# EAGLE board V1d (EAGLE 6.5.0)
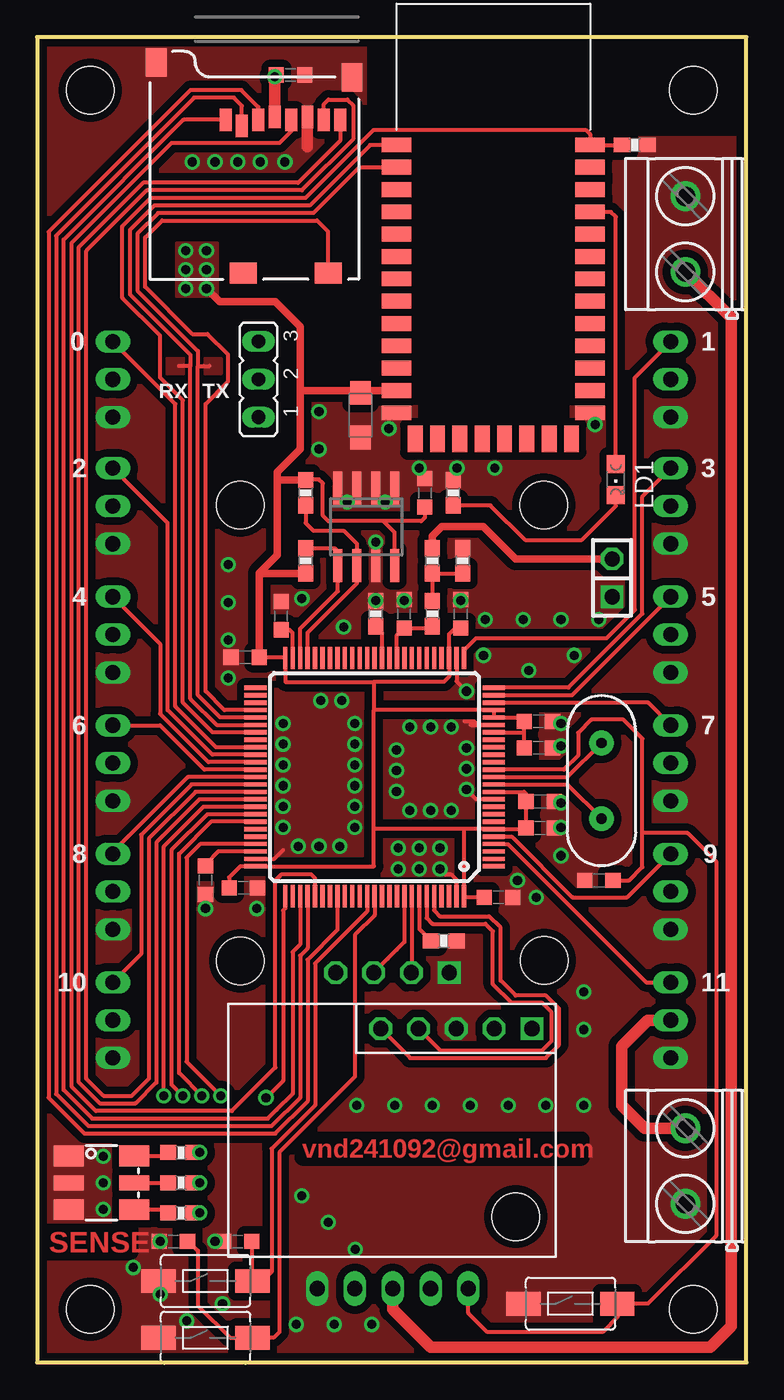
[diagram p0: board, top side]
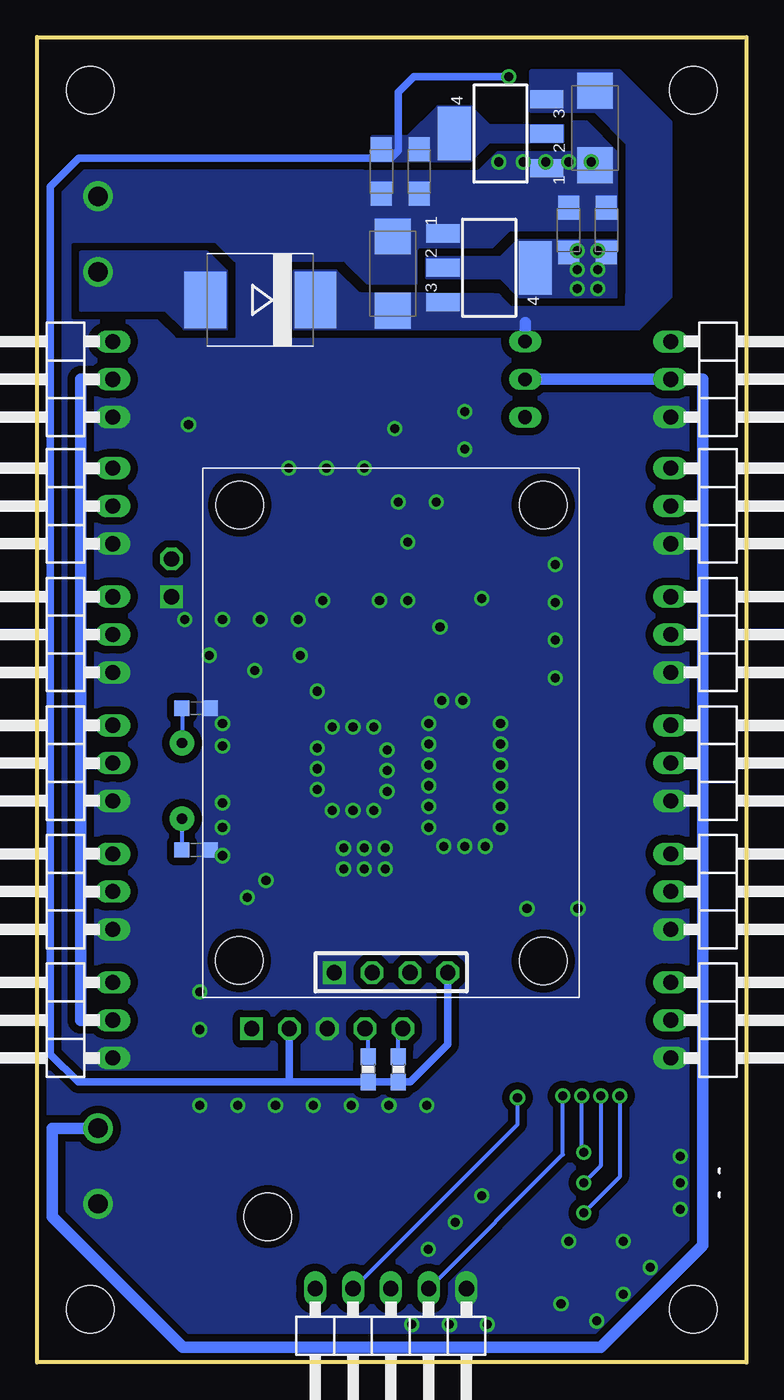
[diagram p1: board, bottom side, seen from below]

Size 47.62 x 89.03 mm. Coordinates in mm from the lower left corner, seen from the top.
Outline: 47.62,89.03 0,89.03 0,0 47.62,0 47.62,89.03
Copper layers (1*16): Top 0.035mm / dielectric 1.5mm / Bottom 0.035mm
Design rules "default *": minimum track width 10mil, minimum drill 24mil, track to track 8mil, track to pad 8mil, pad to pad 8mil, via to via 10mil, smd to smd 8mil, copper to edge 20mil, drill to drill 10mil, minimum pad ring 10mil, minimum via ring 8mil, stop-mask expansion 0mil, vias tented up to drill 100mil, thermal gap 10mil
Net classes: 0 Default: width 0.203 mm; 1 power: width 0.15 mm, drill 0.2 mm, clearance 0.152 mm
Holes 3.2 mm at 44.07,85.47 3.56,85.47 44.07,3.56 3.56,3.56

## Footprints (pad centres in the part's own frame; a part is rotated, then mirrored left to right if it is on the bottom)
C-0603 = smd 1.016 x 1.016: 1 -0.953,0; 2 0.953,0
SMC_A = smd 1.6 x 1.4: + -1.5,0; - 1.5,0
SMC_C = smd 2.4 x 2.4: + -2.5,0; - 2.5,0
SMC = smd 2.8 x 3.8: A 3.7,0; C -3.7,0
LINEAR_SOT223 = smd 1.219 x 2.235: 1 -2.311,-3.099; 2 0,-3.099; 3 2.311,-3.099 | smd 3.6 x 2.2: 4 0,3.099
SO-08 = smd 0.6 x 2.2: 1 -1.905,-2.6; 2 -0.635,-2.6; 3 0.635,-2.6; 4 1.905,-2.6; 5 1.905,2.6; 6 0.635,2.6; 7 -0.635,2.6; 8 -1.905,2.6
1X03/90 = drill 1.016 long: 1 -2.54,-3.81; 2 0,-3.81; 3 2.54,-3.81
1X02 = drill 1.016 square: 1 -1.27,0 | drill 1.016 octagon: 2 1.27,0
1X05/90 = drill 1.016 long: 1 -5.08,-3.81; 2 -2.54,-3.81; 3 0,-3.81; 4 2.54,-3.81; 5 5.08,-3.81
JP2 = drill 0.914 long: 1 -2.54,0; 2 0,0; 3 2.54,0
CHIPLED_0805 = smd 1.2 x 1.2: A 0,-1.05; C 0,1.05
SPARKFUN_0603-RES = smd 1.1 x 1: 1 -0.85,0; 2 0.85,0
TACTILE-SWITCH-1101NE = smd 2.3 x 1.6: P$1 -3.15,0; P$2 3.15,0
MICRO-SD-SOCKET-PP = smd 0.8 x 1.5: 1 -8.94,10.7; 2 -7.84,10.3; 3 -6.74,10.7; 4 -5.64,10.9; 5 -4.54,10.7; 6 -3.44,10.9; 7 -2.34,10.7; 8 -1.24,10.7 | smd 1.8 x 1.4: CD1 -2.05,0.4; CD2 -7.75,0.4 | smd 1.4 x 1.9: GND1 -13.6,14.55; GND3 -0.45,13.55
TQFP100 = smd 1.5 x 0.29: 1 -8,6; 2 -8,5.5; 3 -8,5; 4 -8,4.5; 5 -8,4; 6 -8,3.5; 7 -8,3; 8 -8,2.5; 9 -8,2; 10 -8,1.5; 11 -8,1; 12 -8,0.5; 13 -8,0; 14 -8,-0.5; 15 -8,-1; 16 -8,-1.5; 17 -8,-2; 18 -8,-2.5; 19 -8,-3; 20 -8,-3.5; 21 -8,-4; 22 -8,-4.5; 23 -8,-5; 24 -8,-5.5; 25 -8,-6; 51 8,-6; 52 8,-5.5; 53 8,-5; 54 8,-4.5; 55 8,-4; 56 8,-3.5; 57 8,-3; 58 8,-2.5; 59 8,-2; 60 8,-1.5; 61 8,-1; 62 8,-0.5; 63 8,0; 64 8,0.5; 65 8,1; 66 8,1.5; 67 8,2; 68 8,2.5; 69 8,3; 70 8,3.5; 71 8,4; 72 8,4.5; 73 8,5; 74 8,5.5; 75 8,6 | smd 0.29 x 1.5: 26 -6,-8; 27 -5.5,-8; 28 -5,-8; 29 -4.5,-8; 30 -4,-8; 31 -3.5,-8; 32 -3,-8; 33 -2.5,-8; 34 -2,-8; 35 -1.5,-8; 36 -1,-8; 37 -0.5,-8; 38 0,-8; 39 0.5,-8; 40 1,-8; 41 1.5,-8; 42 2,-8; 43 2.5,-8; 44 3,-8; 45 3.5,-8; 46 4,-8; 47 4.5,-8; 48 5,-8; 49 5.5,-8; 50 6,-8; 76 6,8; 77 5.5,8; 78 5,8; 79 4.5,8; 80 4,8; 81 3.5,8; 82 3,8; 83 2.5,8; 84 2,8; 85 1.5,8; 86 1,8; 87 0.5,8; 88 0,8; 89 -0.5,8; 90 -1,8; 91 -1.5,8; 92 -2,8; 93 -2.5,8; 94 -3,8; 95 -3.5,8; 96 -4,8; 97 -4.5,8; 98 -5,8; 99 -5.5,8; 100 -6,8
BLUETOOTH_SMD = smd 2 x 1: 1 0,0; 2 0,-1.5; 3 0,-3; 4 0,-4.5; 5 0,-6; 6 0,-7.5; 7 0,-9; 8 0,-10.5; 9 0,-12; 10 0,-13.5; 11 0,-15; 12 0,-16.5; 13 0,-18; 22 13,-18; 23 13,-16.5; 24 13,-15; 25 13,-13.5; 26 13,-12; 27 13,-10.5; 28 13,-9; 29 13,-7.5; 30 13,-6; 31 13,-4.5; 32 13,-3; 33 13,-1.5; 34 13,0 | smd 1 x 1.8: 14 1.25,-19.75; 15 2.75,-19.75; 16 4.25,-19.75; 17 5.75,-19.75; 18 7.25,-19.75; 19 8.75,-19.75; 20 10.25,-19.75; 21 11.75,-19.75
BREAKOUT = drill 1.016 square: 1 12.64,-1.096 | drill 1.016 octagon: 2 12.64,1.444; 3 12.64,3.984; 4 12.64,6.524; 5 12.64,9.064 | hole 3.2: 0.006,0
23X30 = drill 1.016 square: 1 0.013,-6.237 | drill 1.016 octagon: 2 0.013,-8.777; 3 0.013,-11.317; 4 0.013,-13.857 | hole 3.2: 31.429,-20.267; 31.429,0.113; 0.811,-20.263; 0.837,0.139
SMD = smd 1.99 x 1.4: B+ -2.2,-1.8; B- 2.2,-1.8; R+ -2.2,1.8; R- 2.2,1.8 | smd 1.99 x 1: G+ -2.2,0; G- 2.2,0
MKDSN1,5/2-5,08 = drill 1.3 pad 2: 1 -2.561,0.025; 2 2.519,0.025
HC49US = drill 0.7 pad 1.651: 1 -2.54,0; 2 2.54,0

## Placement (x,y rotation side)
C1  [C-0603]  36.96,34.42 0 bottom
C2  [C-0603]  17.02,86.49 180 top
C3  6v 10u  [SMC_A]  11.94,76.07 90 bottom
C4  6v 10u  [SMC_A]  21.72,63.63 270 top
C5  16v47u  [SMC_C]  23.75,73.15 90 bottom
C6  [C-0603]  33.66,43.05 0 top
C7  [C-0603]  24.64,50.29 270 top
C8  [C-0603]  33.66,41.28 0 top
C9  [C-0603]  33.78,37.67 0 top
C10  [C-0603]  33.78,35.89 0 top
C11  [C-0603]  26.04,58.42 270 top
C12  [C-0603]  30.99,31.24 0 top
C13  [C-0603]  37.72,32.39 180 top
C14  [C-0603]  28.45,50.29 90 top
C15  [C-0603]  16.38,50.17 90 top
C16  6v 10u  [SMC_A]  21.97,80.01 270 bottom
C17  [C-0603]  11.3,32.39 270 top
C18  [C-0603]  13.97,47.37 180 top
C19  [C-0603]  13.84,31.88 0 top
C20  [C-0603]  36.96,43.94 0 bottom
C21  6v 10u  [SMC_A]  24.51,80.01 270 bottom
C22  16v47u  [SMC_C]  10.16,82.93 270 bottom
C23  6v 10u  [SMC_A]  9.4,76.07 90 bottom
C24  [C-0603]  13.46,8.13 180 top
C25  [C-0603]  9.14,8.13 180 top
D5  MBRS330T3  [SMC]  32.64,71.37 180 bottom
IC1  LINEAR_MC33269ST-3.3T3  [LINEAR_SOT223]  16.51,82.55 90 bottom
IC2  24LC256SN  [SO-08]  22.1,56.13 180 top
IC3  LINEAR_MC33269ST-3.3T3  [LINEAR_SOT223]  17.27,73.53 270 bottom
JP1  [1X03/90]  46.36,40.26 90 bottom
JP2  [1X03/90]  46.36,22.99 90 bottom
JP3  [1X02]  38.61,52.7 90 top
JP4  [1X05/90]  23.88,1.14 180 bottom
JP5  [1X03/90]  46.36,48.89 90 bottom
JP6  [1X03/90]  46.36,66.04 90 bottom
JP7  [1X03/90]  1.27,66.04 270 bottom
JP8  [1X03/90]  46.36,31.62 90 bottom
JP9  [1X03/90]  1.27,57.53 270 bottom
JP10  [1X03/90]  1.27,48.89 270 bottom
JP11  [1X03/90]  46.36,57.53 90 bottom
JP12  [1X03/90]  1.27,40.26 270 bottom
JP13  [1X03/90]  1.27,31.62 270 bottom
JP14  [1X03/90]  1.27,22.99 270 bottom
JP15  [JP2]  14.86,66.04 90 top
LD1  [CHIPLED_0805]  38.86,59.31 180 top
R1  4K7  [SPARKFUN_0603-RES]  25.4,19.68 270 bottom
R2  10K  [SPARKFUN_0603-RES]  9.65,10.03 180 top
R3  10K  [SPARKFUN_0603-RES]  9.65,12.06 180 top
R4  4K7  [SPARKFUN_0603-RES]  23.37,19.68 270 bottom
R5  10K  [SPARKFUN_0603-RES]  40.13,81.79 0 top
R6  10K  [SPARKFUN_0603-RES]  9.65,14.1 180 top
R7  10k  [SPARKFUN_0603-RES]  27.3,28.32 180 top
R8  0.5k  [SPARKFUN_0603-RES]  22.73,50.29 270 top
R9  10K  [SPARKFUN_0603-RES]  27.94,58.42 90 top
R15  4K7  [SPARKFUN_0603-RES]  18.03,58.42 270 top
R16  4K7  [SPARKFUN_0603-RES]  18.03,53.85 270 top
R23  10K  [SPARKFUN_0603-RES]  26.54,50.29 270 top
R24  10K  [SPARKFUN_0603-RES]  26.54,53.85 90 top
R25  10K  [SPARKFUN_0603-RES]  28.57,53.85 270 top
S1  RESET  [TACTILE-SWITCH-1101NE]  35.81,3.94 0 top
S2  RESET  [TACTILE-SWITCH-1101NE]  11.3,1.65 0 top
S3  RESET  [TACTILE-SWITCH-1101NE]  11.3,5.46 0 top
SDCARD2  microSD Socket  [MICRO-SD-SOCKET-PP]  21.59,72.77 0 top
STM  STM32F4X7VX  [TQFP100]  22.66,39.32 180 top
U1  HC_05  [BLUETOOTH_SMD]  24.13,81.79 0 top
U$1  GY-88  [BREAKOUT]  32.13,9.78 90 top
U$10  GPS_MODULE  [23X30]  33.91,26.16 90 bottom
U$12  RGB_LED  [SMD]  4.32,12.06 0 top
X1  MKDSN1,5/2-5,08  [MKDSN1,5/2-5,08]  43.56,75.82 90 top
X2  MKDSN1,5/2-5,08  [MKDSN1,5/2-5,08]  43.56,13.21 90 top
Y1  [HC49US]  37.9,39.07 270 top

## Library data of the parts
C1 C2 C6-C15 C17-C20 C24 C25 = cap-pan40
C3-C5 C16 C21-C23 = rcl
D5 = Robotech Diode of Chung
IC1 IC3 = Robotech_Other
IC2 = microchip; DIGIKEY: 24LC256-E/SN-ND; MF: MICROCHIP; MPN: 24LC256-I/SN; OC_FARNELL: 9757996; OC_NEWARK: 27C9144
JP1 JP2 JP4-JP14 = pinhead-1
JP3 = pinhead
JP15 = jumper
LD1 = led
R1-R9 R15 R16 R23-R25 = Robotech_RCL
S1-S3 = pixhawk2; PARTNO: EVQ-P7J01P
SDCARD2 = SparkFun
STM = pixhawk2; PARTNO: STM32F427VI
U1 = SerialPortBluetooth
U$1 = GY88
U$10 = GPS_module
U$12 = RGB_LED
X1 X2 = con-phoenix-508; MPN: MKDSN 1,5/2-5.08; OC_FARNELL: 1792903; OC_NEWARK: 30M2397
Y1 = SparkFun-FreqCtrl

## Nets
3V3_MCU: C3.+ C4.+ C6.1 C8.1 C9.1 C10.1 C11.2 C12.1 C14.1 C18.1 C19.1 C23.+ IC2.8 IC3.2 IC3.4 R15.1 R16.2 STM.6 STM.11 STM.19 STM.21 STM.22 STM.28 STM.50 STM.75 STM.100 U1.12
3V3_SENSOR: C2.2 C16.+ C21.+ IC1.2 IC1.4 R1.2 R4.2 SDCARD2.4 U$1.2 U$10.4
+5V: JP1.2 JP2.2 JP5.2 JP6.2 JP7.2 JP8.2 JP9.2 JP10.2 JP11.2 JP12.2 JP13.2 JP14.2 JP15.2 X2.2
ADC12_IN8: C7.2 R23.2 STM.35
BOOT0: R7.2 STM.94
BOOT1: R8.2 STM.37
BT_KEY: R5.1 STM.57 U1.34
BUTTONA: C24.1 S3.P$2 STM.87
BUTTONB: C25.1 S2.P$2 STM.88
GND: C1.2 C2.1 C3.- C4.- C5.- C6.2 C7.1 C8.2 C9.2 C10.2 C11.1 C12.2 C13.2 C14.2 C15.2 C16.- C17.2 C18.2 C19.2 C20.2 C21.- C22.- C23.- C24.2 C25.2 IC1.1 IC2.1 IC2.2 IC2.3 IC2.4 IC2.7 IC3.1 JP1.1 JP2.1 JP3.1 JP4.1 JP5.1 JP6.1 JP7.3 JP8.1 JP9.3 JP10.3 JP11.1 JP12.3 JP13.3 JP14.3 R5.2 R7.1 R8.1 R9.2 R25.1 S1.P$1 S2.P$1 S3.P$1 SDCARD2.6 SDCARD2.GND1 SDCARD2.GND3 STM.10 STM.20 STM.27 STM.74 STM.99 U1.13 U1.22 U$1.3 U$10.1 U$12.B+ U$12.G+ U$12.R+ X1.2 X2.1
I2C1_SCL: R1.1 STM.95 U$1.4
I2C1_SDA: R4.1 STM.96 U$1.5
I2C2_SCL: IC2.6 R15.2 STM.47
I2C2_SDA: IC2.5 R16.1 STM.48
JTDI: STM.77
N$1: C1.1 STM.12 Y1.2
N$2: R2.2 U$12.B-
N$3: JP3.2 R24.2
N$4: LD1.A U1.31
N$5: LD1.C R9.1
N$6: R3.2 U$12.G-
N$7: R6.2 U$12.R-
N$9: D5.A JP4.3 X1.1
N$27: R23.1 R24.1 R25.2
N$29: C20.1 STM.13 Y1.1
N$31: C17.1 STM.73
N$32: C15.1 STM.49
PWM_0: JP7.1 STM.59
PWM_1: JP6.3 STM.26
PWM_2: JP9.1 STM.60
PWM_3: JP11.3 STM.25
PWM_4: JP10.1 STM.61
PWM_5: JP5.3 STM.24
PWM_6: JP12.1 STM.62
PWM_7: JP1.3 STM.23
PWM_8: JP13.1 STM.63
PWM_9: JP8.3 STM.5
PWM_10: JP14.1 STM.64
PWM_11: JP2.3 STM.4
RGB_CH1: R2.1 STM.67
RGB_CH2: R3.1 STM.68
RGB_CH3: R6.1 STM.69
SDIO_CLK: SDCARD2.5 STM.80
SDIO_CMD: SDCARD2.3 STM.83
SDIO_D0: SDCARD2.7 STM.65
SDIO_D1: SDCARD2.8 STM.66
SDIO_D2: SDCARD2.1 STM.78
SDIO_D3: SDCARD2.2 STM.79
SDIO_DETECT: SDCARD2.CD1 STM.54
SW-!RESET: C13.1 JP4.5 S1.P$2 STM.14
SW_CLK: JP4.4 STM.76
SW_DIO: JP4.2 STM.72
USART1_RX: STM.93 U$10.2
USART1_TX: STM.92 U$10.3
USART3_RX: STM.56 U1.1
USART3_TX: STM.55 U1.2
VDD: C5.+ C22.+ D5.C IC1.3 IC3.3 JP15.3

## Tracks (layer width: path | path; a pad name or v marks a point on that pad's centre or on a via)
3V3_MCU  (via drill 0.61)
  Top 0.254: C8.1 32.7,42.32 | STM.19 32.7,42.32 | 32.7,42.32 C6.1 32.43,43.32 STM.21 STM.22 22.61,43.82 | C10.1 32.83,35.95 | 32.83,35.95 C9.1 32.83,38.19 32.7,38.32 STM.11 | STM.100 28.71,31.37 | 29.84,31.24 28.66,31.24 STM.100 | 29.97,31.18 C12.1 | 32.83,35.95 32.7,35.82 STM.6 28.66,35.82 | C14.1 28.07,49.34 27.66,48.93 STM.28 27.66,46.08 27.3,45.72 22.61,45.72 | 28.66,35.82 STM.100 | 22.61,35.82 22.61,33.32 STM.75 13.64,33.32 12.89,32.58 C19.1 | 22.61,35.82 22.61,43.82 | 28.66,35.82 22.61,35.82 | 22.61,45.72 16.66,45.72 STM.50 16.66,47.37 C18.1 | 22.61,45.72 22.61,43.82 | IC2.8 24,55.75 23.24,56.52 | 23.24,56.52 19.56,56.52 19.18,56.9 19.18,59.06 18.92,59.31 18.07,59.31 R15.1 | C11.2 26.04,56.77 25.78,56.52 23.24,56.52
  Top 0.508: 29.84,31.24 C12.1 | 21.72,65.29 U1.12 | C4.+ 21.72,65.29 | 21.72,65.29 17.65,65.29 | 17.65,65.29 17.65,61.34 16.13,59.82 16.13,59.27 | 16.13,59.27 16.13,54.23 14.92,53.02 14.92,53 | 14.92,53 C18.1 | R16.2 14.92,53 | 16.13,59.27 R15.1 | 17.65,65.29 17.65,69.6 16,71.25 12.26,71.25 v11.37,72.14
  other vias: 9.97,73.41 9.97,72.14 11.37,73.41 11.37,74.68 9.97,74.68
  pour Bottom (isolate 0.508, no thermals): 8.76,75.31 15.37,75.31 16.51,74.17 21.46,74.17 21.46,72.9 16.51,72.9 15.24,71.63 8.76,71.63
  pour Top (isolate 0.508, no thermals): 9.4,71.63 9.4,75.18 12.07,75.18 12.07,71.63
3V3_SENSOR  (via drill 0.61)
  Top 0.762: SDCARD2.4 v15.95,86.36 15.95,86.49 C2.2
  Bottom 0.508: v15.95,86.36 22.35,86.36 23.37,85.34 23.37,81.41 23.88,80.9 44.83,80.9 46.74,78.99 46.74,20.7 44.87,18.84 30.69,18.84 | 30.69,18.84 R1.2 R4.2 22.57,18.84 20.05,21.35 U$10.4 | U$1.2 30.69,18.84
  pour Bottom (isolate 0.508, no thermals): 12.32,82.04 12.32,83.06 17.27,83.06 18.54,84.33 20.7,84.33 22.73,82.3 25.15,82.3 25.15,80.77 18.54,80.77 17.27,82.04
+5V
  Top 0.762: JP2.2 41.02,22.99 39.24,21.21 39.24,17.27 40.79,15.73 X2.2
  Bottom 0.508: 44.7,22.99 44.7,22.86
  Bottom 0.762: JP10.2 2.92,48.89 | 2.92,57.53 JP9.2 | JP12.2 2.92,40.26 | JP8.2 44.7,31.62 | JP1.2 44.7,40.26 | JP5.2 44.7,48.89 | JP6.2 44.7,66.04 44.7,57.53 | JP13.2 2.92,31.62 | 2.92,57.53 2.92,66.04 JP7.2 JP15.2 | 2.92,48.89 2.92,40.26 | 2.92,40.26 2.92,31.62 | 44.7,31.62 44.7,40.26 | 44.7,40.26 44.7,48.89 | JP11.2 44.7,57.53 | 44.7,48.89 44.7,57.53 | 44.7,31.62 44.7,22.99 JP2.2 | 2.92,48.89 2.92,57.53 | 2.92,22.99 2.92,7.87 9.78,1.02 37.85,1.02 46.61,9.78 46.61,15.73 X2.2 | JP14.2 2.92,22.99 | 2.92,22.99 2.92,31.62
ADC12_IN8
  Top 0.254: 24.41,49.11 C7.2 | STM.35 24.16,48.86 C7.2 | C7.2 26.54,49.34 R23.2
BOOT0
  Top 0.254: STM.94 25.66,29.12 R7.2
BOOT1
  Top 0.254: STM.37 23.16,49.02 R8.2
BT_KEY
  Top 0.254: 37.21,81.92 37.34,81.79 R5.1 | STM.57 11.78,42.32 9.78,44.32 9.78,64.64 8.25,66.17 8.25,68.96 5.71,71.5 5.71,76.33 7.62,78.23 18.03,78.23 22.61,82.8 36.83,82.8 37.13,82.5 U1.34
  Top 0.508: U1.34 37.21,81.87 37.21,81.92
BUTTONA
  Top 0.254: C24.1 14.45,8.09 S3.P$2 15.11,5.46 15.75,6.1 15.75,14.35 18.67,17.27 18.67,26.8 22.16,30.29 STM.87
BUTTONB
  Top 0.254: C25.1 10.16,8.13 10.8,7.49 10.8,3.81 12.95,1.65 S2.P$2 15.88,1.65 16.26,2.03 16.26,14.1 21.34,19.18 21.34,28.7 22.66,30.03 STM.88
GND  (via drill 0.61)
  Top 0.254: 28.7,43.05 29.34,43.05 29.57,42.82 STM.20 29.11,42.82 | STM.27 28.16,45.75 v28.83,45.08 | STM.74 15.91,33.82 16.51,34.42 | STM.99 28.16,32.42 27.81,32.77 27.43,32.77 v27.05,33.15 | STM.10 29.49,37.82 v28.83,38.48
  Top 0.762: SDCARD2.6 18.15,81.66
  other vias: 17.78,51.31 29.97,47.5 22.73,51.18 24.13,41.15 24.13,39.75 24.13,38.35 25.02,37.08 26.42,37.08 27.81,37.08 28.83,41.28 28.83,39.88 25.02,42.67 26.42,42.67 27.81,42.67 11.3,30.48 21.34,37.34 21.34,38.73 21.34,40.13 21.34,35.94 20.45,44.45 19.05,44.45 17.53,34.67 20.32,34.67 18.92,34.67 21.34,41.53 21.34,42.93 16.51,42.93 16.51,41.53 16.51,37.34 16.51,38.73 16.51,40.13 16.51,35.94 24.26,34.54 27.05,34.54 25.65,34.54 24.26,33.15 25.65,33.15 24.64,51.18 23.37,57.78 20.83,57.78 33.53,31.24 32.26,32.39 35.18,42.93 35.18,41.4 35.18,37.59 35.18,35.94 35.18,34.04 22.73,55.12 33.02,46.48 10.41,80.65 11.94,80.65 13.46,80.65 14.99,80.65 16.64,80.65 14.73,30.48 11.94,8.13 8.25,8.13 4.45,13.84 4.45,12.06 4.45,10.29 18.92,63.88 18.92,61.34 36.07,47.5 32.64,49.91 30.1,49.91 35.18,49.91 37.72,49.91 28.45,51.18 28.19,60.07 25.65,60.07 30.73,60.07 37.47,62.99 8.25,4.57 10.05,2.78 6.46,6.37 19.94,2.54 17.4,2.54 22.48,2.54 19.56,9.4 21.35,7.6 17.76,11.19 31.62,17.27 29.08,17.27 34.16,17.27 36.7,17.27 24,17.27 21.46,17.27 26.54,17.27 36.7,22.35 36.7,24.89 12.45,3.94 23.62,62.74 12.83,48.51 12.83,45.97 12.83,51.05 12.83,53.59 20.57,49.4
  pour Top (isolate 0.508, rank 6, no thermals): 35.94,82.17 35.94,63.5 25.4,63.5 25.4,82.17 21.97,82.17 21.97,95.76 -7.75,95.76 -6.86,-6.73 50.67,-6.73 49.78,82.17
  pour Bottom (isolate 0.508, rank 6, no thermals): 21.21,80.01 53.59,80.01 69.6,-11.56 -9.14,-11.56 -9.14,89.79 21.21,89.79
I2C1_SCL
  Top 0.254: STM.95 26.16,29.85 26.54,29.46 30.1,29.46 30.61,28.96 30.61,25.4 31.88,24.13 33.91,24.13 34.54,23.5 34.54,21.59 33.91,20.95 27.07,20.95 U$1.4
  Bottom 0.254: R1.1 25.4,22.21 U$1.4
I2C1_SDA
  Top 0.254: STM.96 26.66,30.36 27.05,29.97 30.35,29.97 31.11,29.21 31.11,25.65 32.13,24.64 34.16,24.64 35.05,23.75 35.05,21.34 34.16,20.45 25.04,20.45 U$1.5
  Bottom 0.254: R4.1 23.37,22.12 U$1.5
I2C2_SCL
  Top 0.254: STM.47 18.16,49.02 21.46,52.32 IC2.6 21.46,54.99 20.57,55.88 18.54,55.88 18.03,56.39 R15.2
I2C2_SDA
  Top 0.254: 20.19,52.45 IC2.5 | 20.07,53.66 IC2.5 | STM.48 17.66,49.28 20.19,51.82 IC2.5 | R16.1 19.98,54.7 20.19,54.48 IC2.5
N$1
  Top 0.254: STM.12 35.61,38.82 Y1.2
  Bottom 0.254: C1.1 Y1.2
N$2
  Top 0.254: U$12.B- 8.8,10.27 R2.2
N$3
  Top 0.508: JP3.2 32.13,53.97 30.54,55.56 30.1,56.01 29.97,56.13 27.18,56.13 26.54,55.5 R24.2
N$4
  Top 0.254: LD1.A 38.86,76.96 38.54,77.29 U1.31
N$5
  Top 0.254: LD1.C 38.86,57.53 36.58,55.25 32.77,55.25 30.44,57.57 R9.1
N$6
  Top 0.254: U$12.G- R3.2
N$7
  Top 0.254: U$12.R- 8.8,13.87 R6.2
N$9
  Top 0.762: JP4.3 23.88,3.56 26.42,1.02 45.21,1.02 46.61,2.41 46.61,70.19 X1.1
  pour Bottom (isolate 0.762, no thermals): 44.7,70.74 38.99,70.74 37.72,69.47 34.93,69.47 34.93,73.28 36.2,74.55 39.24,74.55 44.7,74.55
N$27
  Top 0.254: R23.1 R24.1 R25.2
N$29
  Top 0.254: STM.13 35.61,39.32 Y1.1
  Bottom 0.254: C20.1 Y1.1
N$31
  Top 0.254: STM.73 12.16,34.32 11.3,33.46 C17.1
N$32
  Top 0.254: STM.49 17.16,49.01 16.95,49.21 C15.1
PWM_0
  Top 0.254: STM.59 12.02,41.32 9.27,44.07 9.27,64.39 JP7.1
PWM_1
  Top 0.254: STM.26 28.66,47.84 29.46,48.64 38.23,48.64 40.13,50.55 40.13,66.17 JP6.3
PWM_2
  Top 0.254: STM.60 11.76,40.82 8.76,43.81 8.76,56.39 JP9.1
PWM_3
  Top 0.254: STM.25 35.67,45.32 40.64,50.29 40.64,58.17 JP11.3
PWM_4
  Top 0.254: STM.61 11.49,40.32 8.25,43.56 8.25,48.26 JP10.1
PWM_5
  Top 0.254: STM.24 35.93,44.82 JP5.3
PWM_6
  Top 0.254: STM.62 11.23,39.82 8.25,42.8 JP12.1
PWM_7
  Top 0.254: STM.23 39.24,44.32 41.02,44.32 JP1.3
PWM_8
  Top 0.254: STM.63 10.11,39.32 5.08,34.29 JP13.1
PWM_9
  Top 0.254: STM.5 31.86,35.32 35.94,31.24 39.62,31.24 JP8.3
PWM_10
  Top 0.254: STM.64 10.37,38.82 6.99,35.43 6.99,27.43 JP14.1
PWM_11
  Top 0.254: STM.4 31.6,34.82 40.89,25.53 JP2.3
RGB_CH1  (via drill 0.61)
  Top 0.254: STM.67 11.16,37.32 8.51,34.67 v8.51,17.91 | v10.92,10.03 R2.1
  Bottom 0.254: v8.51,17.91 8.51,12.45 v10.92,10.03
RGB_CH2  (via drill 0.61)
  Top 0.254: STM.68 11.42,36.82 9.02,34.42 9.02,18.67 v9.78,17.91 | v10.92,12.06 R3.1
  Bottom 0.254: v9.78,17.91 9.78,13.21 v10.92,12.06
RGB_CH3  (via drill 0.61)
  Top 0.254: STM.69 11.68,36.32 9.52,34.16 9.52,19.43 v11.05,17.91 | R6.1 v10.92,14.1
  Bottom 0.254: v10.92,14.1 11.05,14.22 v11.05,17.91
SDIO_CLK
  Top 0.254: SDCARD2.5 17.05,82.71 16.26,81.92 9.02,81.92 2.29,75.18 2.29,18.54 3.94,16.89 13.08,16.89 16,19.81 16,32.39 16.13,32.51 16.26,32.64 16.38,32.77 18.41,32.77 18.66,32.52 STM.80
SDIO_CMD
  Top 0.254: SDCARD2.3 14.85,84.34 13.72,85.47 10.29,85.47 0.76,75.95 0.76,17.78 3.17,15.37 16,15.37 18.16,17.53 18.16,27.05 20.16,29.05 STM.83
SDIO_D0
  Top 0.254: STM.65 10.64,38.32 7.49,35.18 7.49,19.05 6.35,17.91 4.45,17.91 3.3,19.05 3.3,74.68 7.37,78.74 17.78,78.74 21.21,82.17 21.21,84.45 20.83,84.84 19.56,84.84 19.25,84.53 SDCARD2.7
SDIO_D1
  Top 0.254: STM.66 10.9,37.82 8,34.92 8,18.8 6.6,17.4 4.19,17.4 2.79,18.8 2.79,74.93 7.11,79.25 17.53,79.25 20.35,82.07 SDCARD2.8
SDIO_D2
  Top 0.254: 17.14,18.03 17.15,18.04 | SDCARD2.1 9.81,83.47 1.78,75.44 1.78,18.29 3.68,16.38 15.49,16.38 16.07,16.95 17.14,18.03 | STM.78 17.66,28.07 17.14,27.56 17.14,18.03
SDIO_D3
  Top 0.254: SDCARD2.2 13.75,84.42 13.21,84.96 10.54,84.96 1.27,75.69 1.27,18.03 3.43,15.88 15.75,15.88 17.65,17.78 17.65,27.3 18.16,27.81 STM.79
SDIO_DETECT
  Top 0.254: SDCARD2.CD1 19.54,75.96 18.8,76.71 8.38,76.71 7.24,75.56 7.24,72.26 10.41,69.09 11.43,69.09 12.83,67.69 12.83,65.91 11.3,64.39 11.3,45.08 12.57,43.82 STM.54
SW-!RESET
  Top 0.254: 40.64,35.56 43.69,35.56 45.59,33.66 45.59,8.51 41.02,3.94 S1.P$2 38.99,3.91 38.99,3.05 37.97,2.03 30.23,2.03 28.96,3.3 JP4.5 | 40.64,35.56 40.64,41.91 39.37,43.18 37.21,43.18 36.32,42.29 36.32,40.77 35.38,39.82 STM.14 | C13.1 39.75,32.39 40.64,33.27 40.64,35.56
SW_CLK  (via drill 0.61)
  Top 0.254: STM.76 16.66,30.5 16.51,30.35 16.51,18.92 v15.37,17.78
  Bottom 0.254: JP4.4 15.37,16 v15.37,17.78
SW_DIO  (via drill 0.61)
  Top 0.254: STM.72 10.95,34.82 10.03,33.91 10.03,20.19 v12.32,17.91
  Bottom 0.254: JP4.2 12.32,13.97 v12.32,17.91
USART1_RX
  Top 0.254: STM.93 25.16,26.2 U$10.2
USART1_TX
  Top 0.254: U$10.3 23.54,27.13 24.15,27.73 24.66,28.24 STM.92
USART3_RX
  Top 0.254: STM.56 12.04,42.82 10.29,44.58 10.29,66.93 | U1.1 22.35,81.79 18.29,77.72 7.87,77.72 6.22,76.07 6.22,71.76 10.29,67.69 10.29,67.31 10.29,66.93 | 10.29,66.93 9.52,66.93
  pour Top: 8.76,67.44 9.78,67.44 9.78,66.42 8.76,66.42
USART3_TX
  Top 0.254: U1.2 21.61,80.29 18.54,77.22 8.13,77.22 6.73,75.82 6.73,72.01 10.8,67.95 10.8,66.93 | STM.55 12.3,43.32 10.8,44.83 10.8,66.93 | 11.56,66.93 11.18,66.93 10.8,66.93
  pour Top: 11.3,67.44 12.32,67.44 12.32,66.42 11.3,66.42
VDD
  Bottom 0.762: JP15.3 14.86,69.85
  pour Bottom (isolate 0.508, rank 2, no thermals): 7.24,69.47 5.08,71.63 5.08,83.31 8.51,86.74 14.48,86.74 14.48,84.07 10.16,84.07 8,81.92 8,71.63 25.91,71.76 26.04,71.76 27.56,73.28 30.35,73.28 30.35,69.47

## Text on the board
Top: vnd241092@gmail.com | SENSE
tNames: 0 | 1 | RX | TX | 2 | 3 | 4 | 5 | 6 | 7 | 8 | 9 | 10 | 11